# Altium PCB PCB2.PcbDoc
Units mil, origin at the board's own origin, x right, y up, seen from the top; angles counter-clockwise.
Board outline 6000 x 4000 mil, 2 copper layers (Top Layer, Bottom Layer); 28 components, 22 nets, 75 pads, 0 vias.
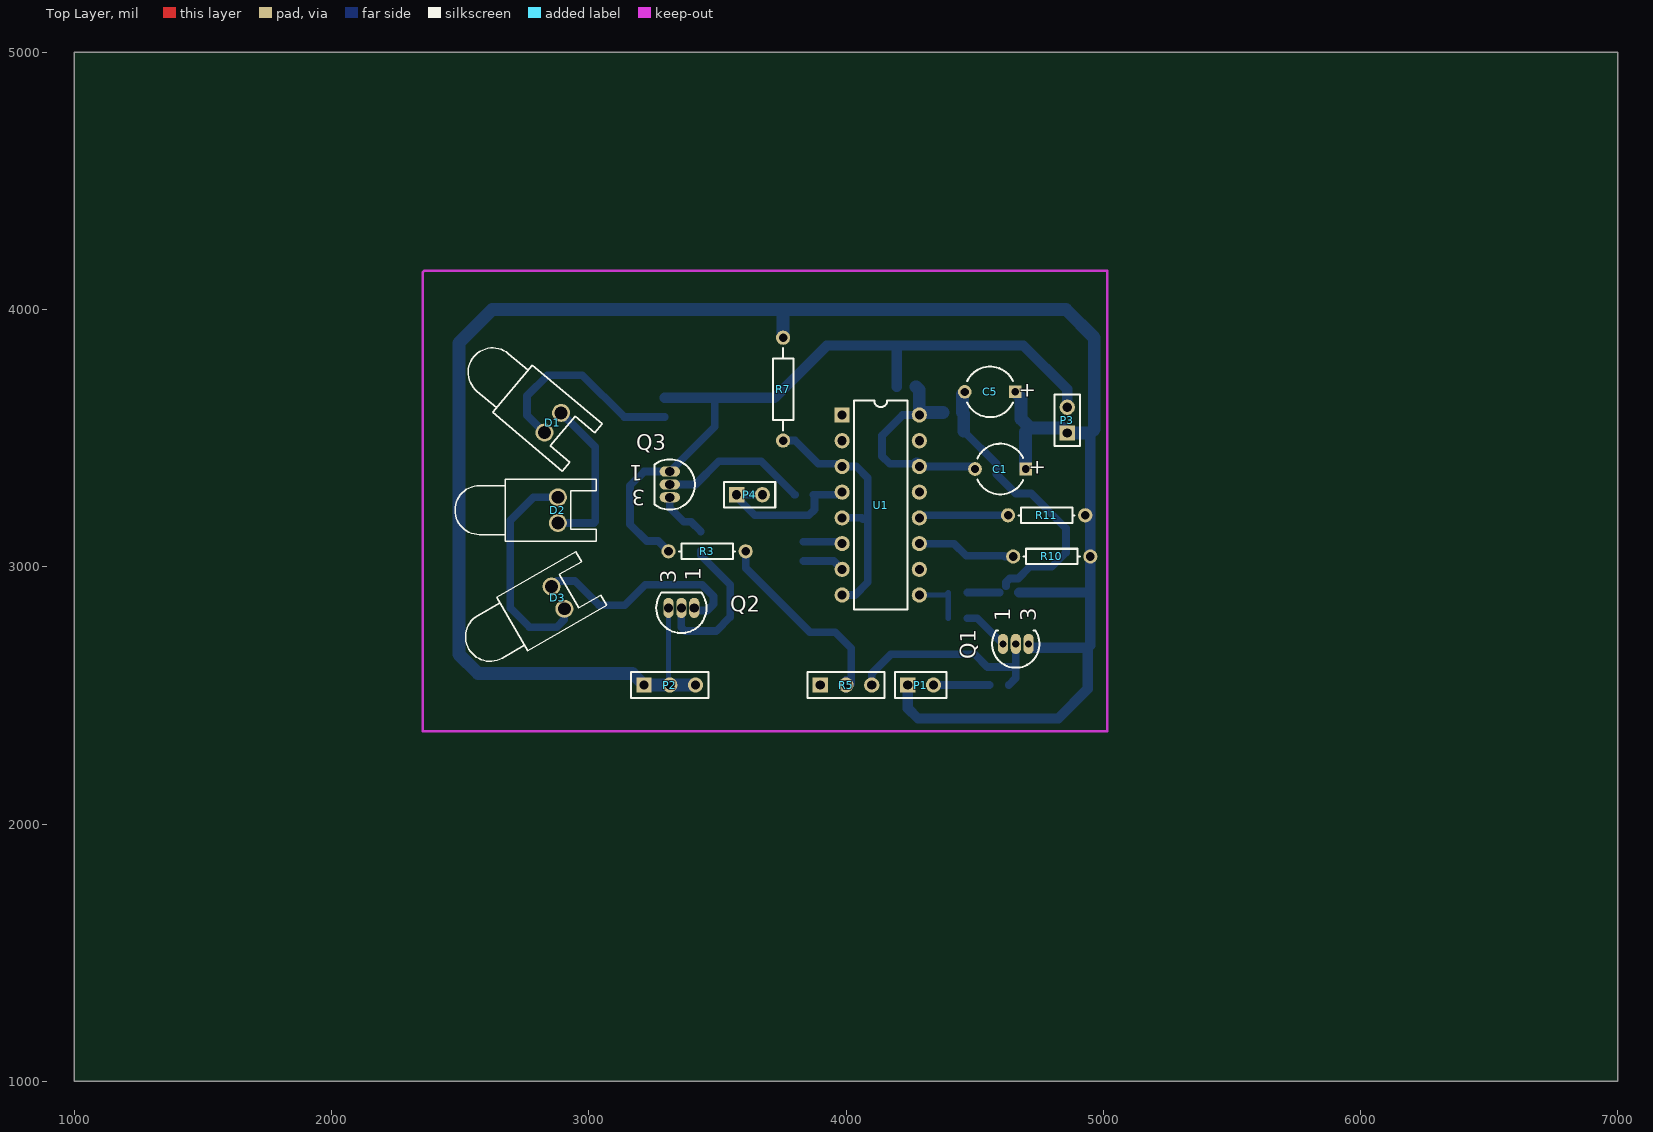
[diagram p0: Top Layer view]
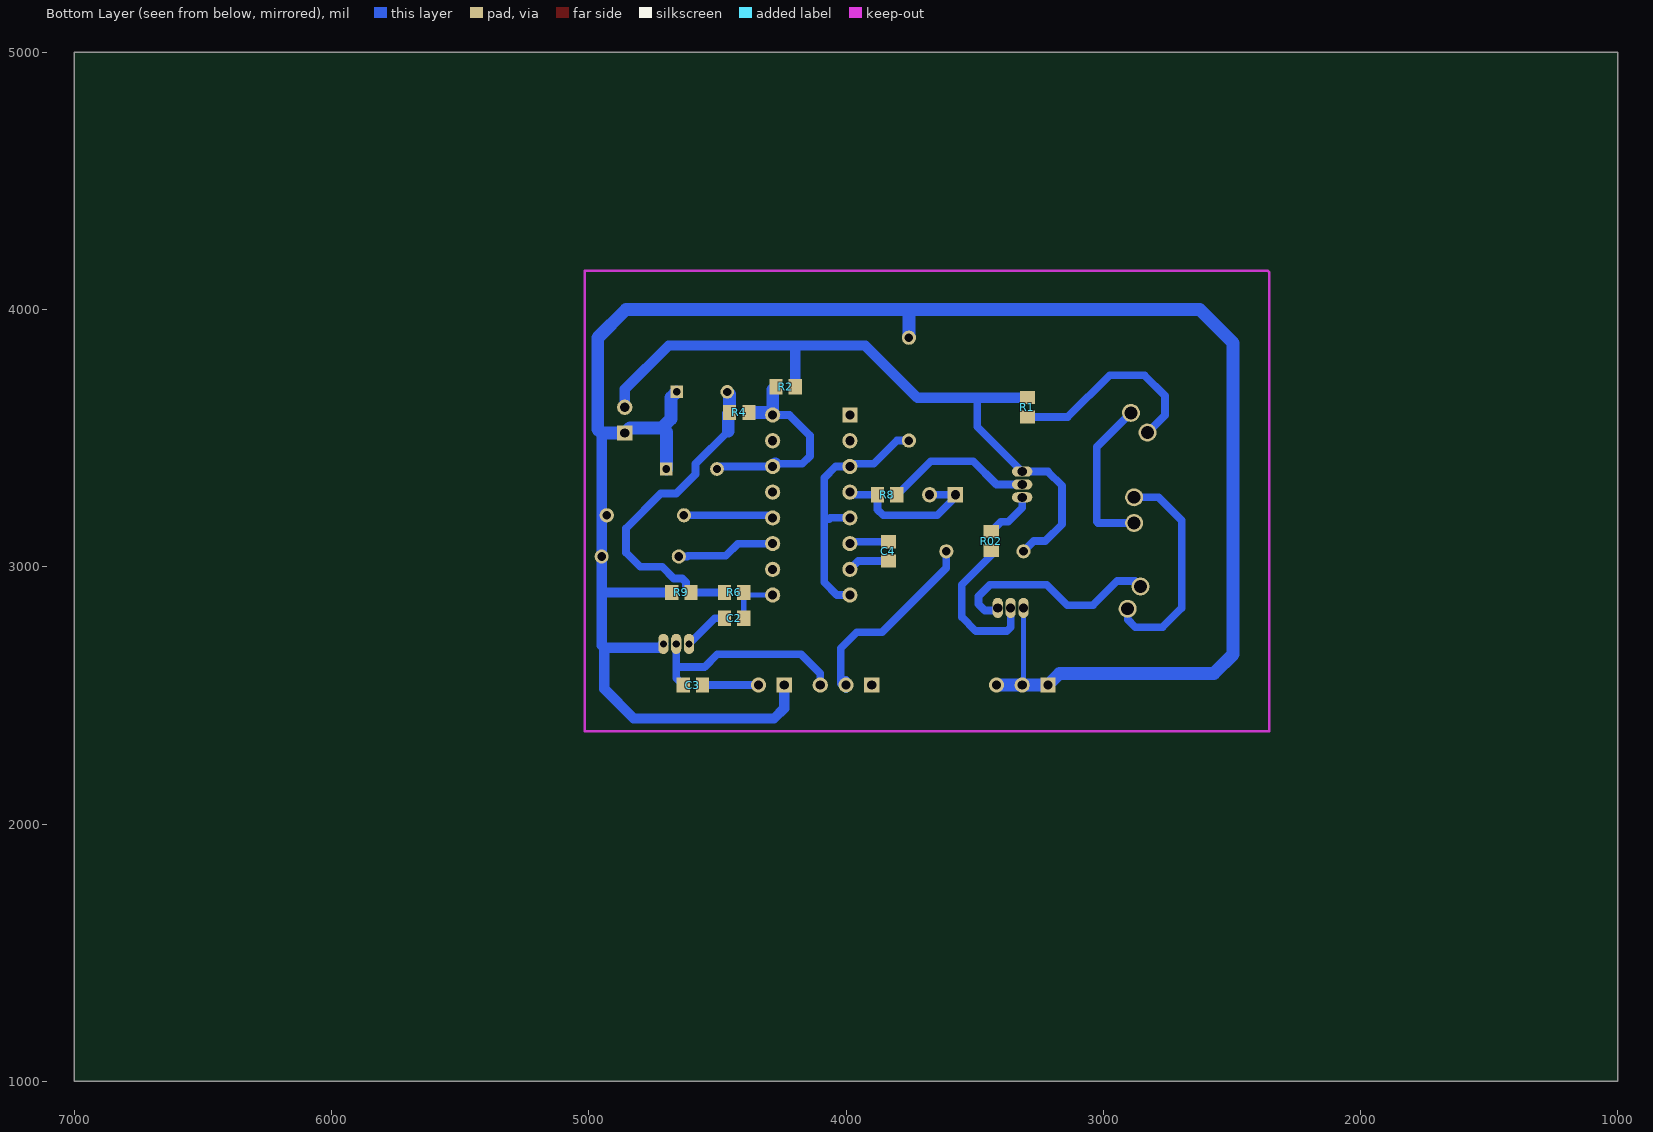
[diagram p1: Bottom Layer view, seen from below]

## Layer stack, top to bottom
Top Layer: signal copper 1.4
Dielectric: dielectric 12.6, FR-4, Dk 4.8
Bottom Layer: signal copper 1.4

## Board outline
1000,1000 7000,1000 7000,5000 1000,5000

## Design rules (kind name [scope] priority, off if disabled: settings)
Clearance [All] p1: gap=10
ComponentClearance [All] p1: gap=10 collisioncheckmode=3 verticalgap=10
PolygonConnect [All] p1: connectstyle=Relief reliefconductorwidth=10 reliefentries=4 polygonreliefangle="90 Angle"
RoutingVias [All] p1: holewidth=28 width=50 viastyle="Through Hole" minholewidth=28 minwidth=50 maxholewidth=28 maxwidth=50
SolderMaskExpansion [All] p1: expansion=4
TestPointUsage [All] p1: valid=0 allowmultiple=FALSE
Testpoint [All] p1: side=15 testpointundercomponent=TRUE minsize=40 maxsize=100 preferedsize=60 minholesize=0 maxholesize=40 preferedholesize=32 testpointgrid=1 style=1023 order=0123456789
Width [All] p1: maxlimit=700 minlimit=10 preferedwidth=10 bottomlayer_maxwidth=70 minimp=50.000000 maximp=50.000000 favimp=50.000000
18 further rules are at their usual default settings.

## Components (designator, comment, footprint, x,y, rotation, side; value= is the part's Value field where it differs from the comment)
C1 "Cap" CAPPR5-5x5 4600,3380 r180 top
C2 "Cap" 6-0805 4435,2800 r180 bottom
C3 "Cap" 6-0805 4595,2540 r0 bottom
C4 "Cap" 6-0805 3835,3060 r270 bottom
C5 "Cap" CAPPR5-5x5 4560,3680 r180 top
D1 "LED0" LED-0 2860,3560 r230 top
D2 "LED0" LED-0 2880,3220 r270 top
D3 "LED0" LED-0 2880,2880 r300 top
P1 "Header 2" HDR1X2 4240,2540 r0 top
P2 "" HDR1X3 3215,2540 r0 top
P3 "" HDR1X2 4860,3520 r90 top
P4 "" HDR1X2 3575,3280 r0 top
Q1 "NPN" TO-92 4660,2700 r90 top
Q2 "NPN" TO-92A 3360,2840 r90 top
Q3 "NPN" TO-92A 3315,3320 r180 top
R1 "Res2" 6-0805 3295,3620 r90 bottom
R2 "Res2" 6-0805 4235,3700 r180 bottom
R02 "Res2" 6-0805 3435,3100 r90 bottom
R3 "Res2" AXIAL-0.3 3460,3060 r180 top
R4 "Res2" 6-0805 4415,3600 r180 bottom
R5 "" HDR1X3 3900,2540 r0 top
R6 "Res2" 6-0805 4435,2900 r180 bottom
R7 "Res2" AXIAL-0.4 3755.45,3690.45 r90 top
R8 "Res2" 6-0805 3840,3280 r180 bottom
R9 "Res2" 6-0805 4640,2900 r180 bottom
R10 "Res2" AXIAL-0.3 4800,3040 r0 top
R11 "Res2" AXIAL-0.3 4780,3200 r0 top
U1 "CD4046" DIP-16 4135,3240 r270 top

## Footprints (in the part's own frame and the unit in brackets; to place one, negate y for a bottom-side part, rotate by r counter-clockwise, add the part's x,y. Pads: shape width x height; smd on the part's side, far side on the other; paste and mask are expansions set on the pad)
6-0805 [mm] "Chip Resistor; Body 2.0 x 1.3 mm (LxW typ)"
  rect 1.3x1.5 smd: 1(-0.95,0) 2(0.95,0)
AXIAL-0.3 [mm] "Resistor; 2 Leads"
  round 1.4 hole 0.85: 1(-3.81,0) 2(3.81,0)
  silkscreen extent -2.77,-0.76 2.77,0.76
AXIAL-0.4 [mm] "Resistor; 2 Leads"
  round 1.4 hole 0.85: 1(-5.08,0) 2(5.08,0)
  silkscreen extent -4.06,-1.02 4.06,1.02
CAPPR5-5x5 [mm] "Capacitor, Electrolytic, Radial; Body 5 x 5 mm (Dia.xH typ); Pin Spacing 5 mm (typ)"
  rect 1.25x1.25 hole 0.75: 1(-2.5,0)
  round 1.35 hole 0.8: 2(2.5,0)
  silkscreen extent -2.26,-2.5 2.27,2.5
DIP-16 [mm] "DIP; 16 Leads; Row Spacing 7.62 mm; Pitch 2.54 mm"
  rect 1.5x1.5 hole 0.9: 1(-8.89,-3.81)
  round 1.5 hole 0.9: 2(-6.35,-3.81) 3(-3.81,-3.81) 4(-1.27,-3.81) 5(1.27,-3.81) 6(3.81,-3.81) 7(6.35,-3.81) 8(8.89,-3.81) 9(8.89,3.81) 10(6.35,3.81) 11(3.81,3.81) 12(1.27,3.81) 13(-1.27,3.81) 14(-3.81,3.81) 15(-6.35,3.81) 16(-8.89,3.81)
  silkscreen extent -10.3,-2.65 10.3,2.65
HDR1X2 [mm] "Connector; Header; 2 Position"
  rect 1.5x1.5 hole 0.9: 1(0,0)
  round 1.5 hole 0.9: 2(2.54,0)
  silkscreen extent -1.27,-1.27 3.81,1.27
HDR1X3 [mm] "Connector; Header; 3 Position"
  rect 1.5x1.5 hole 0.9: 1(0,0)
  round 1.5 hole 0.9: 2(2.54,0) 3(5.08,0)
  silkscreen extent -1.27,-1.27 6.35,1.27
LED-0 [mil] "Typical INFRARED GaAs LED; 2 Leads"
  round 70 hole 50: 1(50,0) 2(-50,0)
  silkscreen extent -120,-400 120,150
TO-92 [mm] "TO, Flat Index; 3 In-Line, Axial Leads; Body Dia. 4.6mm; Leads 0.41 x 0.39 mm (max)"
  oval 2x1 hole 0.7: 1(0,1.27) 2(0,0) 3(0,-1.27)
  silkscreen extent -2.34,-2.34 1.35,2.34
TO-92A [mm] "TO, Flat Index; 3 In-Line, Axial Leads; Body Dia. 4.5mm; Leads 0.51 x 0.48 mm (max)"
  oval 2x1 hole 0.9: 1(0,-1.27) 2(0,0) 3(0,1.27)
  silkscreen extent -2.48,-2.48 1.5,2.48

## Part data
C1 C2 C3 C4 C5: "Capacitor"
D1 D2 D3: "Typical INFRARED GaAs LED"
P1: "Header, 2-Pin"
P2: library part "Header 3", "Header, 3-Pin"
P3 P4: library part "Header 2", "Header, 2-Pin"
Q1 Q2 Q3: "NPN Bipolar Transistor"
R1 R2 R02 R3 R4 R6 R7 R8 R9 R10 R11: "Resistor"
R5: library part RPot, "Potentiometer"
U1: library part Component_1

## Nets (pads, with @x,y where several pads share a name; then routed paths per layer and width w, separated by ;. In a path a pad name is that pad's centre, name@x,y a point inside that pad or via, vN(x,y) a via of type N, cw(c..) or ccw(c..) an arc to the next point about the centre after c; other vN are vias at no path point)
GND: C1.1 C5.1 P1.1 P2.1 P2.2 P2.3 P3.1 Q1.3 Q2.3 R7.2 R9.1 R10.2 R11.2 | length 8457.2
  Bottom Layer w20: Q2.3 3310,2545 P2.2
  Bottom Layer w40: P1.1 4240,2450 4280,2410 4825,2410 4940,2525 4940,2685 ; R9.1@4672.4,2900 4940,2900 ; Q1.3 4725,2685 4940,2685 ; 4950,3520 R10.2 4950,2695 4940,2685
  Bottom Layer w50: P2.3 P2.2 P2.1 3170,2585 2570,2585 2495,2660 2495,3870 2625,4000 4855,4000 4965,3890 4965,3535 4950,3520 P3.1 4840,3540 4715,3540 ; R7.2 3755.45,3989.55 ; C5.1 4680,3658.43 4680,3575 4715,3540 ; C1.1 4698.43,3523.43 4715,3540
NetC1_2: C1.2 R2.1 R4.2 U1.14 U1.16 | length 838.2
  Bottom Layer w30: U1.14@4275,3400 4170,3400 4140,3430 4140,3510 4220,3590 U1.16 ; U1.14 4491.57,3390 C1.2
  Bottom Layer w50: R2.1 4285,3687.4 U1.16 ; U1.14@4275,3400 U1.14 ; U1.16@4295,3600 R4.2
NetC2_1: C2.1 Q1.1 | length 179
  Bottom Layer w30: C2.1 4510,2800 Q1.1
NetC3_1: C3.1 P1.2 | length 217.6
  Bottom Layer w30: P1.2 C3.1
NetC3_2: C3.2 Q1.2 R5.3 | length 830.3
  Bottom Layer w30: R5.3 4100,2585 4175,2660 4500,2660 4550,2610 4655,2610 4660,2615 ; C3.2 4660,2567.6 4660,2615 ; Q1.2 4660,2615
NetC4_1: C4.1 U1.6 | length 142.6
  Bottom Layer w30: C4.1 U1.6@3977.6,3097.4
NetC4_2: C4.2 U1.7 | length 163.5
  Bottom Layer w30: C4.2 3952.4,3022.6 U1.7
NetC5_2: C5.2 R4.1 R6.1 R9.2 | length 1239.5
  Bottom Layer w30: 4457.6,3527.4 4585,3400 4585,3360 4660,3285 4720,3285 4855,3150 4855,3055 4800,3000 4715,3000 4669.53,2954.53 4636.46,2954.53 4621.81,2939.88 R9.2@4621.81,2924.21 ; R6.1 R9.2@4597.6,2900
  Bottom Layer w50: C5.2@4452.4,3670.83 R4.1 4457.6,3594.8 4457.6,3527.4
NetD1_1: D1.1 R1.1 | length 806.8
  Bottom Layer w30: D1.1 2760,3589.56 2760,3665 2840,3745 2975,3745 3137.4,3582.6 R1.1
NetD1_2: D1.2 D2.1 | length 625.4
  Bottom Layer w30: D2.1 3020,3170 3025,3175 3025,3465.44 D1.2
NetD2_2: D2.2 D3.1 | length 857.5
  Bottom Layer w30: D2.2 2785,3270 2695,3180 2695,2840 2770,2765 2875,2765 2905,2795 D3.1
NetD3_2: D3.2 Q2.1 | length 825.5
  Bottom Layer w30: D3.2 2876.7,2945 2945,2945 3040,2850 3140,2850 3220,2930 3440,2930 3485,2885 3485,2855 3460,2830 3430,2830
NetP4_1: P4.1 P4.2 R8.1 U1.4 | length 625
  Bottom Layer w30: P4.2 P4.1 3575,3270 3645,3200 3855,3200 3877.4,3222.4 R8.1 ; R8.1@3872.4,3280 R8.1 ; U1.4 3975,3280 R8.1
NetQ2_2: Q2.2 R02.1 | length 599.2
  Bottom Layer w30: Q2.2 3360,2765 3375,2750 3495,2750 3550,2805 3550,2930 3435,3045 R02.1
NetQ3_2: Q3.2 R8.2 | length 578.7
  Bottom Layer w30: Q3.2 3415,3320 3505,3410 3670,3410 3800,3280 R8.2
NetQ3_3: Q3.3 R02.2 | length 198.4
  Bottom Layer w30: Q3.3 3315,3230 3370,3175 3397.4,3175 R02.2
NetR3_1: R3.1 R5.2 | length 777
  Bottom Layer w30: R3.1 3610,2995 3860,2745 3957.6,2745 4020,2682.6 R5.2@4020,2545 ; R5.2@4000,2525 R5.2@4000,2560
NetR7_1: R7.1 U1.3 U1.5 U1.8 | length 983.4
  Bottom Layer w30: R7.1 3801.95,3490.45 3892.4,3400 U1.3@3975,3400 ; U1.8 4035,2890 4085,2940 4085,3150 4085,3345 4040,3390 U1.3 ; U1.5 4060,3190 4065,3185
NetR10_1: R10.1 U1.11 | length 385.7
  Bottom Layer w30: U1.11 4420,3090 4467.4,3042.6 4615,3042.6 4617.6,3040 R10.1
NetR11_1: R11.1 U1.12 | length 349.1
  Bottom Layer w30: U1.12 4295,3200 R11.1
VCC: P3.2 Q3.1 R1.2 R2.2 R3.2 | length 2835.6
  Bottom Layer w30: R3.2 3270,3100 3225,3100 3160,3165 3160,3315 3215,3370 Q3.1 3490,3545 3490,3647.4 3500,3657.4
  Bottom Layer w40: R1.2 3500,3657.4 3722.4,3657.4 3925,3860 4200,3860 ; R2.2 4197.6,3857.6 4200,3860 ; P3.2 4860,3690 4690,3860 4200,3860
VCIN: C2.2 R6.2 U1.9 | length 216.7
  Bottom Layer w20: U1.9 4387.6,2890 R6.2 C2.2
pads on no net: R5.1 U1.1 U1.2 U1.10 U1.13 U1.15

## Keep-outs
Keep-Out Layer:
  lines w10: 2355,3980 2355,4145 2360,4150 5015,4150 5015,2360 2355,2360 2355,4010

## Text inside footprints (layer, text, board x,y; h text height)
C1: Top Overlay "+" at 4779.13,3409.53 h59.06 r180
C5: Top Overlay "+" at 4739.13,3709.53 h59.06 r180
Q1: Top Overlay "3" at 4740.12,2787.56 h59.05 r90; Top Overlay "1" at 4637.95,2787.56 h59.05 r90
Q2: Top Overlay "1" at 3434.8,2944.72 h59.05 r90; Top Overlay "3" at 3339.92,2935.67 h59.05 r90
Q3: Top Overlay "1" at 3210.28,3394.8 h59.05 r180; Top Overlay "3" at 3219.33,3299.92 h59.05 r180